# EAGLE board 10x10_charlieplexed_3.2x3.2_5_shrouded_headers (EAGLE 6.0)
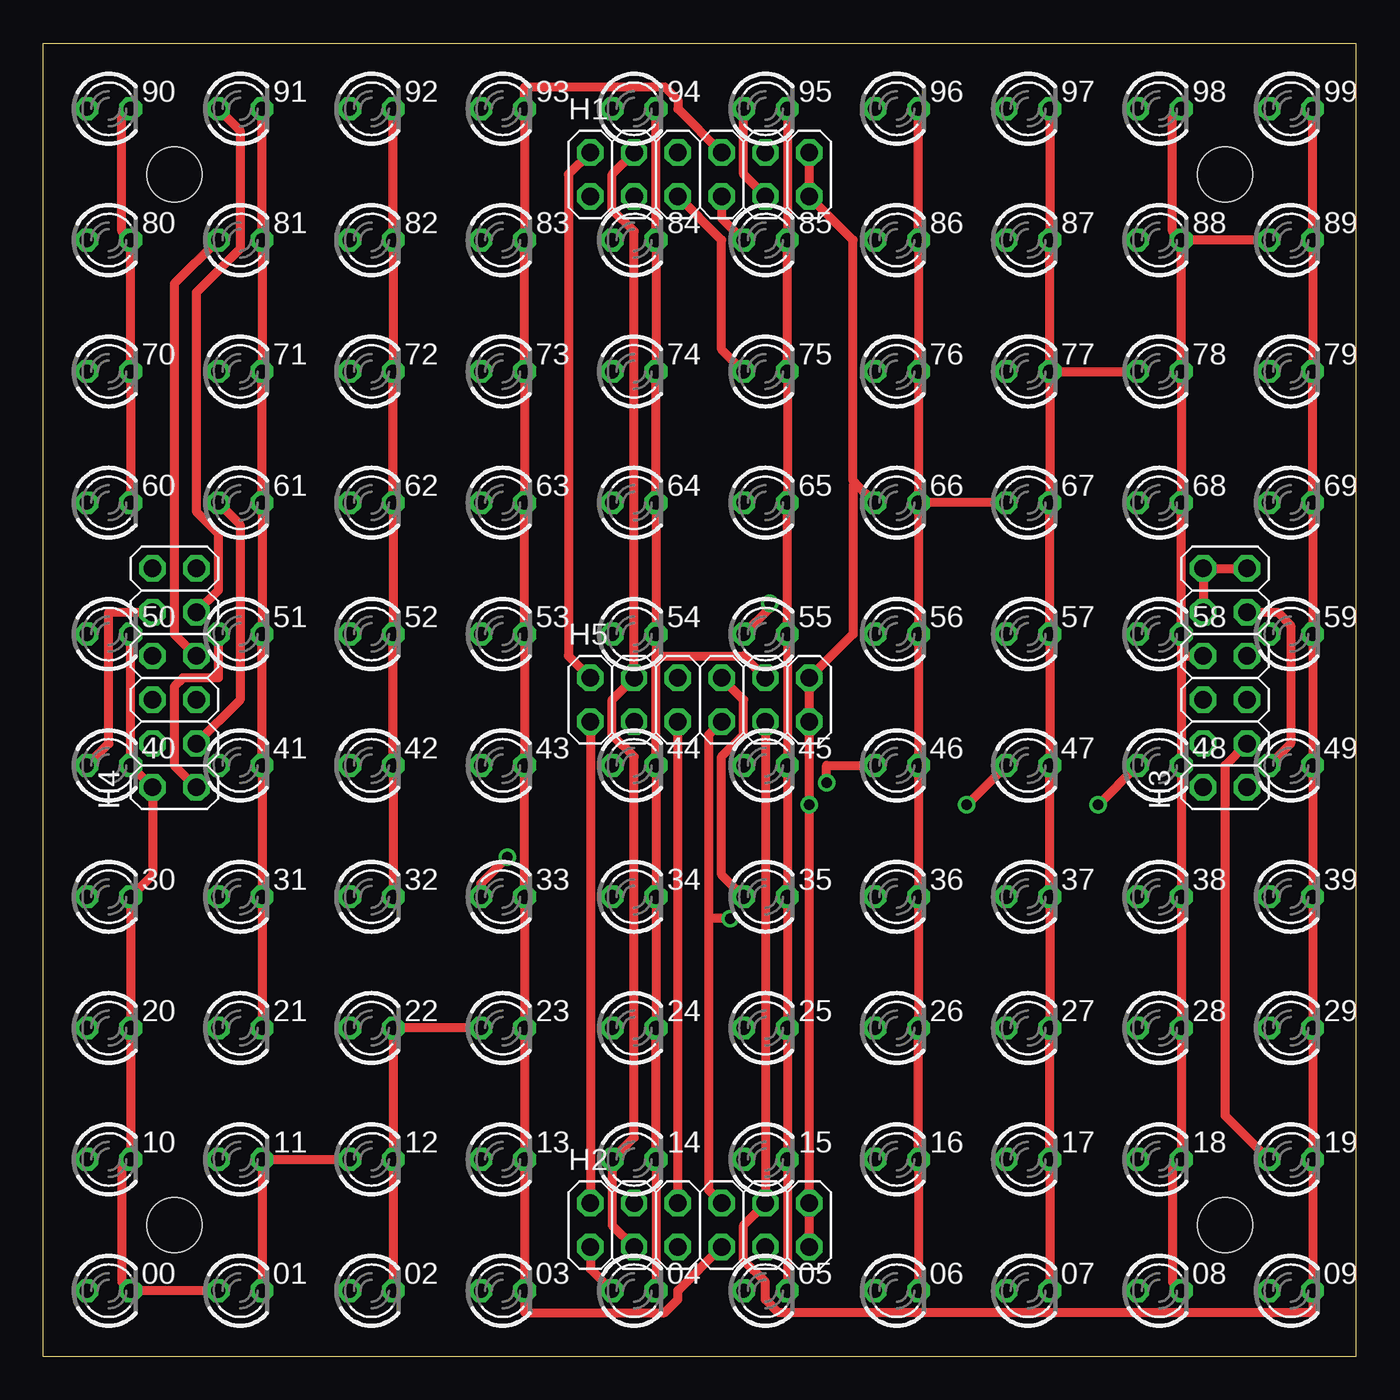
[diagram p0: board, top side]
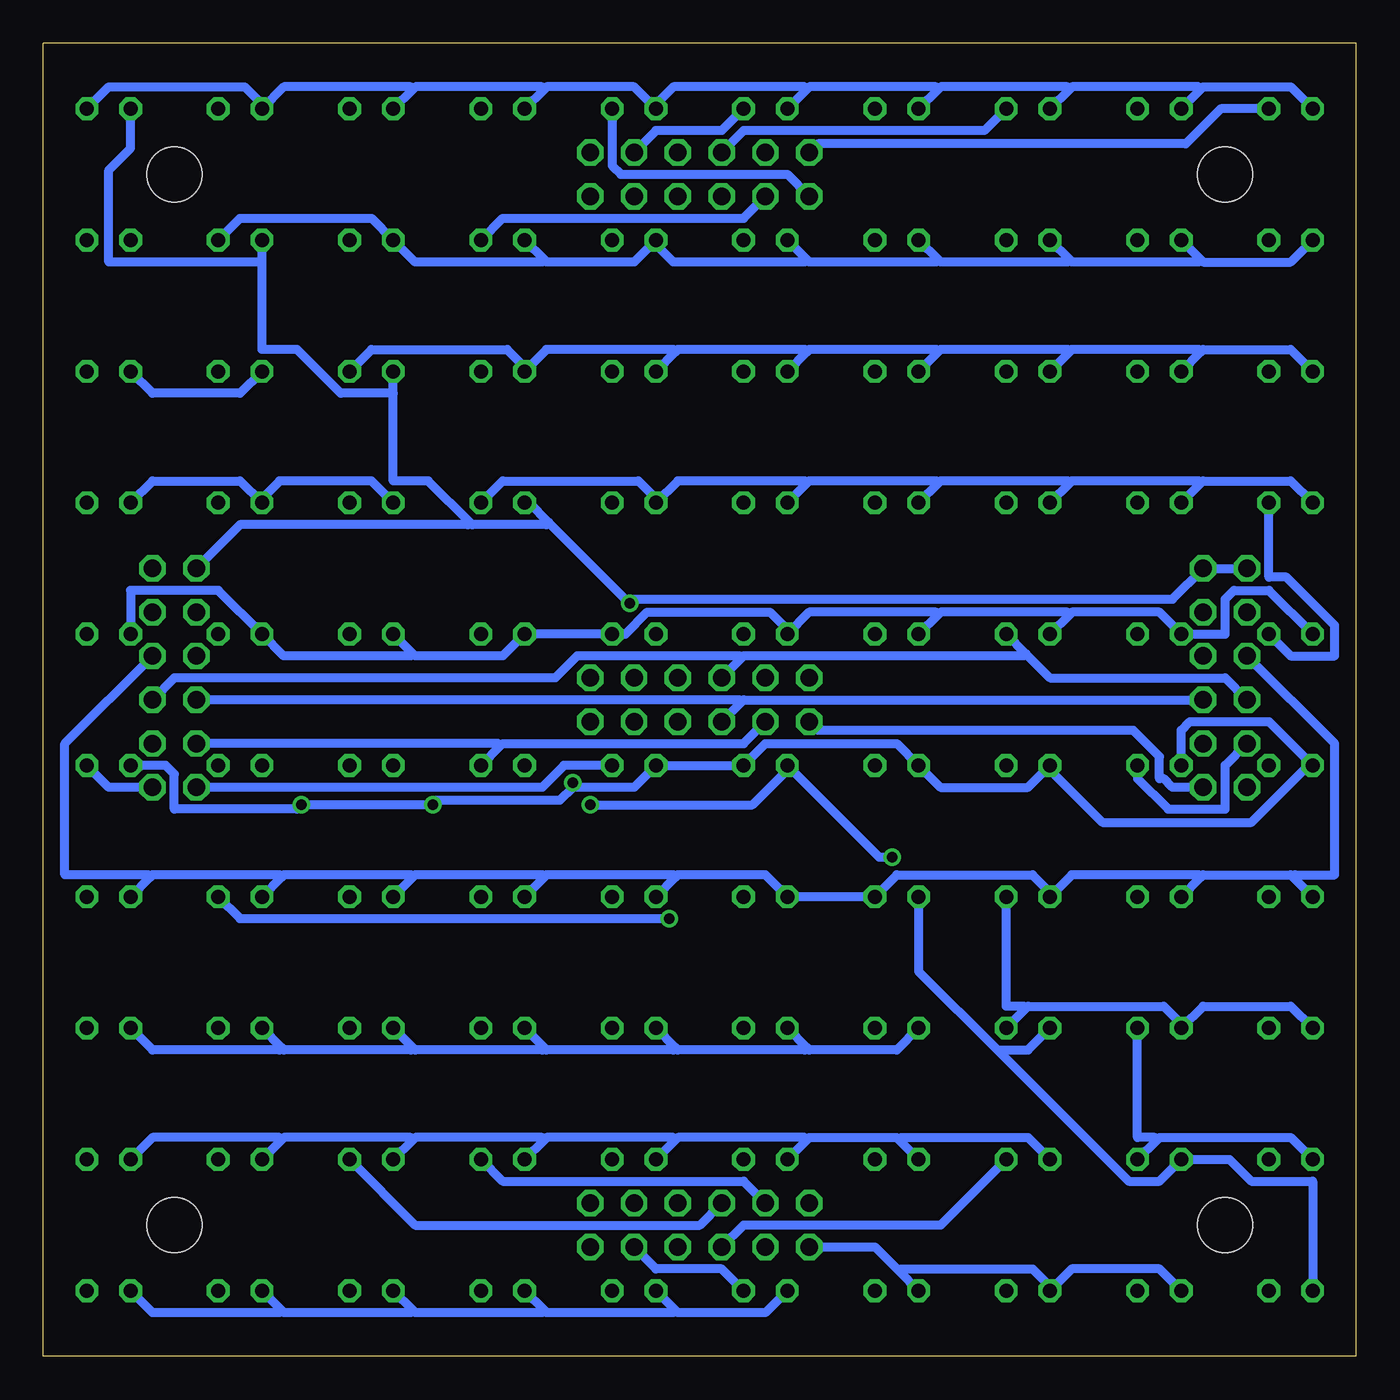
[diagram p1: board, bottom side, seen from below]

Size 76.2 x 76.2 mm. Coordinates in mm from the lower left corner, seen from the top.
Outline: 0,0 0,76.2 76.2,76.2 76.2,0 0,0
Copper layers (1*16): Top 0.035mm / dielectric 1.5mm / Bottom 0.035mm
Design rules: minimum track width 20mil, minimum drill 24mil, track to track 10mil, track to pad 10mil, pad to pad 8mil, via to via 8mil, smd to smd 8mil, copper to edge 40mil, drill to drill 8mil, minimum pad ring 10mil, minimum via ring 8mil, stop-mask expansion 4mil, vias tented up to drill 0mil, thermal gap 10mil
Holes 3.2 mm at 7.62,68.58 68.58,68.58 68.58,7.62 7.62,7.62

## Footprints (pad centres in the part's own frame; a part is rotated, then mirrored left to right if it is on the bottom)
LED3MM = drill 0.813 octagon: A -1.27,0; K 1.27,0
2X06 = drill 1.016 octagon: 1 -6.35,-1.27; 2 -6.35,1.27; 3 -3.81,-1.27; 4 -3.81,1.27; 5 -1.27,-1.27; 6 -1.27,1.27; 7 1.27,-1.27; 8 1.27,1.27; 9 3.81,-1.27; 10 3.81,1.27; 11 6.35,-1.27; 12 6.35,1.27

## Placement (x,y rotation side)
00  [LED3MM]  3.81,3.81 0 top
01  [LED3MM]  11.43,3.81 0 top
02  [LED3MM]  19.05,3.81 0 top
03  [LED3MM]  26.67,3.81 0 top
04  [LED3MM]  34.29,3.81 0 top
05  [LED3MM]  41.91,3.81 0 top
06  [LED3MM]  49.53,3.81 0 top
07  [LED3MM]  57.15,3.81 0 top
08  [LED3MM]  64.77,3.81 0 top
09  [LED3MM]  72.39,3.81 0 top
10  [LED3MM]  3.81,11.43 0 top
11  [LED3MM]  11.43,11.43 0 top
12  [LED3MM]  19.05,11.43 0 top
13  [LED3MM]  26.67,11.43 0 top
14  [LED3MM]  34.29,11.43 0 top
15  [LED3MM]  41.91,11.43 0 top
16  [LED3MM]  49.53,11.43 0 top
17  [LED3MM]  57.15,11.43 0 top
18  [LED3MM]  64.77,11.43 0 top
19  [LED3MM]  72.39,11.43 0 top
20  [LED3MM]  3.81,19.05 0 top
21  [LED3MM]  11.43,19.05 0 top
22  [LED3MM]  19.05,19.05 0 top
23  [LED3MM]  26.67,19.05 0 top
24  [LED3MM]  34.29,19.05 0 top
25  [LED3MM]  41.91,19.05 0 top
26  [LED3MM]  49.53,19.05 0 top
27  [LED3MM]  57.15,19.05 0 top
28  [LED3MM]  64.77,19.05 0 top
29  [LED3MM]  72.39,19.05 0 top
30  [LED3MM]  3.81,26.67 0 top
31  [LED3MM]  11.43,26.67 0 top
32  [LED3MM]  19.05,26.67 0 top
33  [LED3MM]  26.67,26.67 0 top
34  [LED3MM]  34.29,26.67 0 top
35  [LED3MM]  41.91,26.67 0 top
36  [LED3MM]  49.53,26.67 0 top
37  [LED3MM]  57.15,26.67 0 top
38  [LED3MM]  64.77,26.67 0 top
39  [LED3MM]  72.39,26.67 0 top
40  [LED3MM]  3.81,34.29 0 top
41  [LED3MM]  11.43,34.29 0 top
42  [LED3MM]  19.05,34.29 0 top
43  [LED3MM]  26.67,34.29 0 top
44  [LED3MM]  34.29,34.29 0 top
45  [LED3MM]  41.91,34.29 0 top
46  [LED3MM]  49.53,34.29 0 top
47  [LED3MM]  57.15,34.29 0 top
48  [LED3MM]  64.77,34.29 0 top
49  [LED3MM]  72.39,34.29 0 top
50  [LED3MM]  3.81,41.91 0 top
51  [LED3MM]  11.43,41.91 0 top
52  [LED3MM]  19.05,41.91 0 top
53  [LED3MM]  26.67,41.91 0 top
54  [LED3MM]  34.29,41.91 0 top
55  [LED3MM]  41.91,41.91 0 top
56  [LED3MM]  49.53,41.91 0 top
57  [LED3MM]  57.15,41.91 0 top
58  [LED3MM]  64.77,41.91 0 top
59  [LED3MM]  72.39,41.91 0 top
60  [LED3MM]  3.81,49.53 0 top
61  [LED3MM]  11.43,49.53 0 top
62  [LED3MM]  19.05,49.53 0 top
63  [LED3MM]  26.67,49.53 0 top
64  [LED3MM]  34.29,49.53 0 top
65  [LED3MM]  41.91,49.53 0 top
66  [LED3MM]  49.53,49.53 0 top
67  [LED3MM]  57.15,49.53 0 top
68  [LED3MM]  64.77,49.53 0 top
69  [LED3MM]  72.39,49.53 0 top
70  [LED3MM]  3.81,57.15 0 top
71  [LED3MM]  11.43,57.15 0 top
72  [LED3MM]  19.05,57.15 0 top
73  [LED3MM]  26.67,57.15 0 top
74  [LED3MM]  34.29,57.15 0 top
75  [LED3MM]  41.91,57.15 0 top
76  [LED3MM]  49.53,57.15 0 top
77  [LED3MM]  57.15,57.15 0 top
78  [LED3MM]  64.77,57.15 0 top
79  [LED3MM]  72.39,57.15 0 top
80  [LED3MM]  3.81,64.77 0 top
81  [LED3MM]  11.43,64.77 0 top
82  [LED3MM]  19.05,64.77 0 top
83  [LED3MM]  26.67,64.77 0 top
84  [LED3MM]  34.29,64.77 0 top
85  [LED3MM]  41.91,64.77 0 top
86  [LED3MM]  49.53,64.77 0 top
87  [LED3MM]  57.15,64.77 0 top
88  [LED3MM]  64.77,64.77 0 top
89  [LED3MM]  72.39,64.77 0 top
90  [LED3MM]  3.81,72.39 0 top
91  [LED3MM]  11.43,72.39 0 top
92  [LED3MM]  19.05,72.39 0 top
93  [LED3MM]  26.67,72.39 0 top
94  [LED3MM]  34.29,72.39 0 top
95  [LED3MM]  41.91,72.39 0 top
96  [LED3MM]  49.53,72.39 0 top
97  [LED3MM]  57.15,72.39 0 top
98  [LED3MM]  64.77,72.39 0 top
99  [LED3MM]  72.39,72.39 0 top
H1  [2X06]  38.1,68.58 0 top
H2  [2X06]  38.1,7.62 0 top
H3  [2X06]  68.58,39.37 90 top
H4  [2X06]  7.62,39.37 90 top
H5  [2X06]  38.1,38.1 0 top

## Library data of the parts
00 01-09 10-99 = led
H1-H5 = pinhead

## Nets
D: 00.A 11.A 22.A 33.A 44.A 55.A 66.A 77.A 88.A 99.A H1.11 H1.12 H2.11 H2.12 H3.10 H3.11 H3.12 H4.11 H4.12 H5.11 H5.12
S0: 00.K 01.A 02.A 03.A 04.A 05.A 06.A 07.A 08.A 09.A 10.K 20.K 30.K 40.K 50.K 60.K 70.K 80.K 90.K H1.2 H2.1 H4.2 H5.2
S1: 01.K 10.A 11.K 12.A 13.A 14.A 15.A 16.A 17.A 18.A 19.A 21.K 31.K 41.K 51.K 61.K 71.K 81.K 91.K H1.4 H2.3 H3.3 H4.4 H5.4
S2: 02.K 12.K 20.A 21.A 22.K 23.A 24.A 25.A 26.A 27.A 28.A 29.A 32.K 42.K 52.K 62.K 72.K 82.K 92.K H1.6 H2.5 H3.5 H4.6 H5.6
S3: 03.K 13.K 23.K 30.A 31.A 32.A 33.K 34.A 35.A 36.A 37.A 38.A 39.A 43.K 53.K 63.K 73.K 83.K 93.K H1.8 H2.7 H3.7 H4.8 H5.8
S4: 04.K 14.K 24.K 34.K 40.A 41.A 42.A 43.A 44.K 45.A 46.A 47.A 48.A 49.A 54.K 64.K 74.K 84.K 94.K H1.10 H2.9 H3.9 H4.10 H5.10
S5: 05.K 15.K 25.K 35.K 45.K 50.A 51.A 52.A 53.A 54.A 55.K 56.A 57.A 58.A 59.A 65.K 75.K 85.K 95.K H1.1 H2.2 H3.2 H4.1 H5.1
S6: 06.K 16.K 26.K 36.K 46.K 56.K 60.A 61.A 62.A 63.A 64.A 65.A 66.K 67.A 68.A 69.A 76.K 86.K 96.K H1.3 H2.4 H3.4 H4.3 H5.3
S7: 07.K 17.K 27.K 37.K 47.K 57.K 67.K 70.A 71.A 72.A 73.A 74.A 75.A 76.A 77.K 78.A 79.A 87.K 97.K H1.5 H2.6 H3.6 H4.5 H5.5
S8: 08.K 18.K 28.K 38.K 48.K 58.K 68.K 78.K 80.A 81.A 82.A 83.A 84.A 85.A 86.A 87.A 88.K 89.A 98.K H1.7 H2.8 H3.8 H4.7 H5.7
S9: 09.K 19.K 29.K 39.K 49.K 59.K 69.K 79.K 89.K 90.A 91.A 92.A 93.A 94.A 95.A 96.A 97.A 98.A 99.K H1.9 H2.10 H3.1 H4.9 H5.9

## Tracks (layer width: path | path; a pad name or v marks a point on that pad's centre or on a via)
D  (via drill 0.61)
  Top 0.508: v26.92,28.96 25.4,27.43 33.A | H2.11 H2.12 v44.45,32 H5.11 H5.12 46.99,41.91 46.99,50.55 47.12,50.67 | H3.10 H3.12 H3.11 | H1.12 H1.11 46.99,64.77 46.99,50.8 47.12,50.67 | 55.A 42.16,43.43 v42.16,43.69 | 66.A 47.12,50.67
  Bottom 0.508: 00.A 2.54,10.16 6.1,10.16 7.37,11.43 11.A 11.43,10.16 13.21,10.16 20.83,17.78 | 22.A 19.05,17.78 20.83,17.78 | 20.83,17.78 25.4,22.35 33.A | v26.92,28.96 27.69,28.96 44.A 33.02,34.04 35.05,32 v44.45,32 | H4.12 H4.11 10.67,43.94 42.16,43.94 v42.16,43.69 46.86,48.39 | 46.86,48.39 48.01,49.53 66.A | 55.88,55.88 55.88,50.8 53.85,50.8 51.44,48.39 | 55.88,55.88 77.A | 51.44,48.39 51.31,48.26 46.99,48.26 46.86,48.39 | 63.5,63.5 63.5,58.42 61.47,58.42 58.93,55.88 55.88,55.88 | 63.5,63.5 88.A | 99.A 71.12,70.1 72.39,68.83 72.39,63.5 63.5,63.5 | H3.12 64.77,48.26 51.56,48.26 51.44,48.39
S0
  Top 0.508: 01.A 00.K 4.57,4.32 4.57,10.92 10.K 20.K 30.K 6.35,27.94 H4.2 40.K 50.K | 04.A 31.75,5.08 H2.1 | H5.2 30.48,40.64 30.48,68.58 H1.2 | 60.K 70.K 80.K 4.57,65.28 4.57,71.88 90.K
  Bottom 0.508: 01.A 11.43,5.08 16.51,5.08 02.A 17.78,4.06 18.8,5.08 26.42,5.08 26.54,4.95 | 26.54,4.95 27.94,6.35 H2.1 | 26.54,4.95 03.A | 39.5,2.67 39.37,2.54 34.29,2.54 04.A | 39.5,2.67 05.A | 47.12,2.67 46.99,2.54 39.62,2.54 39.5,2.67 | 47.12,2.67 06.A | 54.74,2.67 54.61,2.54 47.24,2.54 47.12,2.67 | 54.74,2.67 07.A | 62.36,2.67 62.23,2.54 54.86,2.54 54.74,2.67 | 62.36,2.67 08.A | 09.A 69.85,2.54 62.48,2.54 62.36,2.67 | 60.K 5.08,45.21 4.06,45.21 1.27,42.42 1.27,40.64 3.81,40.64 50.K | H1.2 31.24,70.36 9.91,70.36 7.87,72.39 90.K
S1
  Top 0.508: 01.K 11.K 12.A | 91.K 81.K 71.K 61.K 51.K 41.K 31.K 21.K | H2.3 33.02,7.62 14.A 34.29,12.7 34.29,34.8 33.02,36.07 33.02,38.1 H5.4 34.29,65.28 33.02,66.55 33.02,68.58 H1.4 | H3.3 68.58,34.29 68.58,13.97 19.A
  Bottom 0.508: 10.A 3.81,12.7 11.43,12.7 11.56,12.57 | 11.K 11.56,12.57 | 21.K 12.7,12.7 11.68,12.7 11.56,12.57 | H4.4 7.62,34.29 7.62,31.75 10.92,31.75 12.7,33.53 41.K | 26.54,12.57 26.67,12.7 31.75,12.7 31.88,12.57 | 26.54,12.57 13.A | 14.A 31.88,12.57 | 39.5,12.57 39.37,12.7 32,12.7 31.88,12.57 | 39.5,12.57 15.A | 47.12,12.57 46.99,12.7 39.62,12.7 39.5,12.57 | 47.12,12.57 16.A | 54.74,12.57 54.61,12.7 47.24,12.7 47.12,12.57 | 54.74,12.57 17.A | 62.36,12.57 62.23,12.7 54.86,12.7 54.74,12.57 | 62.36,12.57 18.A | 19.A 69.85,12.7 62.48,12.7 62.36,12.57 | 12.A 19.05,12.7 26.42,12.7 26.54,12.57
S2
  Top 0.508: 92.K 82.K 72.K 62.K 52.K 42.K 32.K | 02.K 12.K 22.K 23.A
  Bottom 0.508: H1.6 35.56,71.12 21.59,71.12 92.K | H4.6 7.62,39.37 17.78,39.37 19.18,40.77 | 52.K 19.18,40.77 | 35.69,40.51 35.56,40.64 19.3,40.64 19.18,40.77 | 35.69,40.51 H5.6 | H3.5 68.58,39.37 46.48,39.37 45.21,40.64 35.81,40.64 35.69,40.51 | H2.5 35.56,7.62 24.13,7.62 12.K | 20.A 3.81,20.32 8.89,20.32 21.A 10.16,19.3 11.18,20.32 19.05,20.32 19.18,20.19 | 31.88,17.91 31.75,17.78 26.67,17.78 23.A | 31.88,17.91 24.A | 39.5,17.91 39.37,17.78 32,17.78 31.88,17.91 | 39.5,17.91 25.A | 47.12,17.91 46.99,17.78 39.62,17.78 39.5,17.91 | 47.12,17.91 26.A | 54.74,17.91 54.61,17.78 47.24,17.78 47.12,17.91 | 54.74,17.91 27.A | 62.36,17.91 62.23,17.78 54.86,17.78 54.74,17.91 | 62.36,17.91 28.A | 29.A 69.85,17.78 62.48,17.78 62.36,17.91 | 22.K 19.18,20.19 | 32.K 20.32,20.32 19.3,20.32 19.18,20.19
S3
  Top 0.508: H1.8 36.83,72.39 36.83,72.9 36.07,73.66 27.94,73.66 93.K 83.K 73.K 63.K 53.K 43.K 33.K 23.K 13.K 03.K 27.94,2.54 36.07,2.54 36.83,3.3 36.83,3.81 H2.7 | H5.8 40.64,38.1 40.64,36.07 39.37,34.8 39.37,27.94 35.A
  Bottom 0.508: 3.68,27.81 3.81,27.94 8.89,27.94 9.02,27.81 | 3.68,27.81 30.A | 31.A 9.02,27.81 | 9.02,27.81 9.14,27.94 16.51,27.94 32.A 17.78,26.92 18.8,27.94 26.67,27.94 33.K 34.A 34.29,27.94 39.37,27.94 39.5,27.81 | H4.8 1.27,35.56 1.27,27.94 3.56,27.94 3.68,27.81 | 39.5,27.81 35.A | 47.12,27.81 46.99,27.94 39.62,27.94 39.5,27.81 | 47.12,27.81 36.A | 54.74,27.81 54.61,27.94 47.24,27.94 47.12,27.81 | 54.74,27.81 37.A | 62.36,27.81 62.23,27.94 54.86,27.94 54.74,27.81 | 62.36,27.81 38.A | 69.98,27.81 69.85,27.94 62.48,27.94 62.36,27.81 | 69.98,27.81 39.A | H3.7 74.93,35.56 74.93,27.94 70.1,27.94 69.98,27.81
S4  (via drill 0.61)
  Top 0.508: 04.K 14.K 24.K 34.K 44.K 35.56,40.64 | 94.K 84.K 74.K 64.K 54.K 35.56,40.64 | H5.10 40.64,40.64 35.56,40.64 | H4.10 3.81,43.18 3.81,35.56 40.A | 49.A 72.39,35.56 72.39,42.42 71.63,43.18 H3.9 | 46.A 45.47,34.29 v45.47,33.27 | v53.59,32 47.A | v61.21,32 48.A
  Bottom 0.508: H2.9 40.64,5.08 36.83,5.08 04.K | H1.10 40.64,71.12 36.83,71.12 94.K | 41.A 10.16,36.32 9.65,36.83 5.08,36.83 40.A 2.79,34.29 6.1,30.99 14.73,30.99 17.78,34.04 42.A 19.05,33.02 24.13,33.02 43.A 26.67,35.56 34.29,35.56 44.K 45.A 41.91,33.02 45.21,33.02 v45.47,33.27 45.47,33.02 46.23,32.26 53.34,32.26 v53.59,32 v61.21,32 61.47,31.75 68.58,31.75 68.58,33.78 69.09,34.29 49.A
S5
  Top 0.508: H5.1 H2.2 | H4.1 7.62,34.29 7.62,38.86 8.13,39.37 10.16,39.37 51.A | 05.K 15.K 25.K 35.K 45.K 55.K 65.K 75.K 85.K 95.K
  Bottom 0.508: 50.A 5.08,44.45 7.11,44.45 7.62,43.94 7.62,41.91 51.A 11.43,43.18 16.51,43.18 16.64,43.05 | 16.64,43.05 52.A | 24.26,43.05 24.13,43.18 16.76,43.18 16.64,43.05 | 24.26,43.05 53.A | 24.26,43.05 24.38,43.18 31.75,43.18 54.A 33.02,42.16 34.04,43.18 41.15,43.18 42.42,41.91 55.K 56.A 49.53,40.64 54.61,40.64 54.74,40.77 | H5.1 31.24,36.32 12.95,36.32 11.43,34.8 11.43,33.53 11.18,33.53 10.67,33.02 H4.1 | H1.1 33.02,68.58 42.67,68.58 43.18,69.09 95.K | 54.74,40.77 57.A | 54.74,40.77 54.86,40.64 62.23,40.64 58.A 66.04,44.45 71.12,44.45 59.A | H3.2 47.24,33.02 45.97,34.29 45.K
S6
  Top 0.508: 06.K 16.K 26.K 36.K 46.K 56.K 66.K | H4.3 11.43,38.1 11.43,48.26 61.A | 67.A 66.K | 96.K 86.K 76.K 66.K
  Bottom 0.508: H2.4 35.56,10.16 49.53,10.16 16.K | H5.3 35.56,35.56 49.53,35.56 49.66,35.43 | 46.K 49.66,35.43 | H3.4 49.78,35.56 49.66,35.43 | 60.A 3.81,50.8 8.89,50.8 9.02,50.67 | 61.A 9.02,50.67 | 16.64,50.67 16.51,50.8 9.14,50.8 9.02,50.67 | 16.64,50.67 62.A | 24.26,50.67 24.13,50.8 16.76,50.8 16.64,50.67 | 24.26,50.67 63.A | 31.88,50.67 31.75,50.8 24.38,50.8 24.26,50.67 | 31.88,50.67 64.A | 31.88,50.67 32,50.8 39.37,50.8 65.A 40.64,49.78 41.66,50.8 49.53,50.8 66.K | 69.A 69.85,50.8 64.77,50.8 68.A 63.5,49.78 62.48,50.8 57.15,50.8 67.A | H1.3 35.56,66.04 49.53,66.04 86.K
S7
  Top 0.508: H1.5 39.37,64.77 39.37,58.42 75.A | 97.K 87.K 77.K | 77.K 67.K 57.K 47.K 37.K 27.K 17.K 07.K | 77.K 78.A | H2.6 H5.5
  Bottom 0.508: 70.A 3.81,58.42 8.89,58.42 9.02,58.29 | 71.A 9.02,58.29 | 16.64,58.29 16.51,58.42 9.14,58.42 9.02,58.29 | 16.64,58.29 72.A | 24.26,58.29 24.13,58.42 16.76,58.42 16.64,58.29 | 24.26,58.29 73.A | 31.88,58.29 31.75,58.42 24.38,58.42 24.26,58.29 | 31.88,58.29 74.A | 39.5,58.29 39.37,58.42 32,58.42 31.88,58.29 | 39.5,58.29 75.A | 39.5,58.29 39.62,58.42 46.99,58.42 76.A 48.26,57.4 49.28,58.42 57.15,58.42 77.K | 79.A 69.85,55.88 64.77,55.88 78.A | H2.6 38.1,7.62 54.61,7.62 17.K | H4.5 35.56,38.1 35.69,37.97 | H5.5 35.69,37.97 | H3.6 35.81,38.1 35.69,37.97
S8  (via drill 0.61)
  Top 0.508: 85.A 39.37,66.04 H1.7 | H4.7 7.62,41.91 7.62,62.23 81.A | H2.8 38.61,9.65 38.61,25.4 | 38.61,25.4 38.61,36.07 H5.7 | 08.K 65.53,4.32 65.53,10.92 18.K 28.K 38.K 48.K 66.04,40.64 | 89.A 88.K | 98.K 65.53,71.88 65.53,65.28 88.K | 66.04,40.64 58.K 68.K 78.K 88.K | 66.04,40.64 H3.8 | v39.88,25.4 38.61,25.4
  Bottom 0.508: 47.12,63.63 46.99,63.5 41.91,63.5 85.A 40.64,64.52 39.62,63.5 32,63.5 31.88,63.63 | 47.12,63.63 86.A | 47.12,63.63 47.24,63.5 54.61,63.5 87.A 57.15,66.04 64.77,66.04 88.K | 80.A 3.81,63.5 8.89,63.5 9.02,63.63 | 81.A 9.02,63.63 | 16.64,63.63 16.51,63.5 9.14,63.5 9.02,63.63 | 16.64,63.63 82.A | 24.26,63.63 24.13,63.5 16.76,63.5 16.64,63.63 | 24.26,63.63 83.A | 31.88,63.63 31.75,63.5 24.38,63.5 24.26,63.63 | 31.88,63.63 84.A | v39.88,25.4 64.77,25.4 38.K
S9
  Top 0.508: 95.A 40.64,68.58 H1.9 | H4.9 10.16,44.45 10.16,47.75 8.89,49.02 8.89,61.72 11.43,64.26 11.43,71.12 91.A | H5.9 H2.10 40.64,7.62 40.64,5.59 41.91,4.32 41.91,3.3 42.67,2.54 73.66,2.54 09.K 19.K 29.K 39.K 49.K 59.K 69.K 79.K 89.K 99.K
  Bottom 0.508: 47.12,73.53 46.99,73.66 41.91,73.66 95.A 40.64,72.64 39.62,73.66 32,73.66 31.88,73.53 | 47.12,73.53 96.A | 54.74,73.53 54.61,73.66 47.24,73.66 47.12,73.53 | 54.74,73.53 97.A | 54.74,73.53 54.86,73.66 62.23,73.66 98.A 63.5,72.64 64.52,73.66 72.39,73.66 99.K | 90.A 3.81,73.66 8.89,73.66 9.02,73.53 | 91.A 9.02,73.53 | 16.64,73.53 16.51,73.66 9.14,73.66 9.02,73.53 | 16.64,73.53 92.A | 24.26,73.53 24.13,73.66 16.76,73.66 16.64,73.53 | 24.26,73.53 93.A | 31.88,73.53 31.75,73.66 24.38,73.66 24.26,73.53 | 31.88,73.53 94.A | 49.K 72.39,33.02 H3.1